# Altium PCB PCB.pcbdoc
Units mil, origin at the board's own origin, x right, y up, seen from the top; angles counter-clockwise.
Board outline 3420 x 4505 mil, 2 copper layers (Top Layer, Bottom Layer); 22 components, 33 nets, 81 pads, 18 vias.
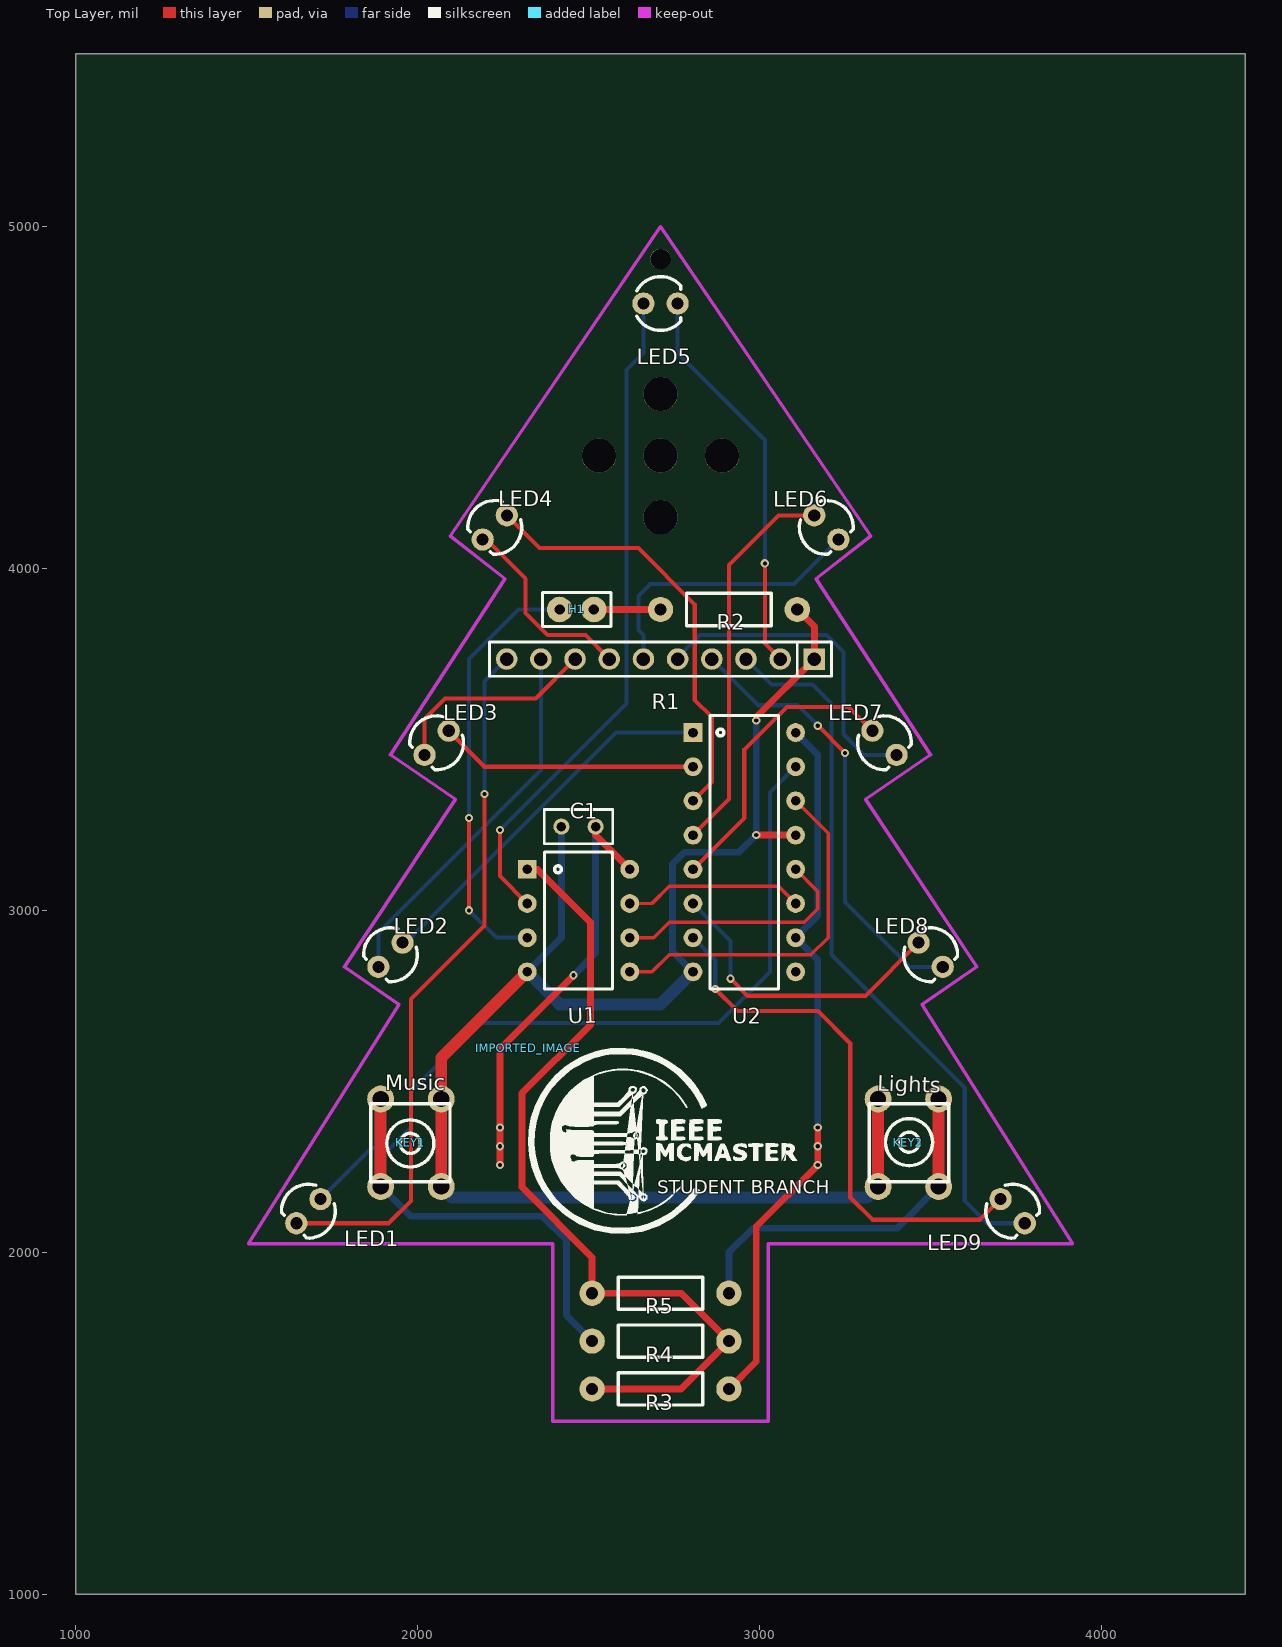
[diagram p0: Top Layer view]
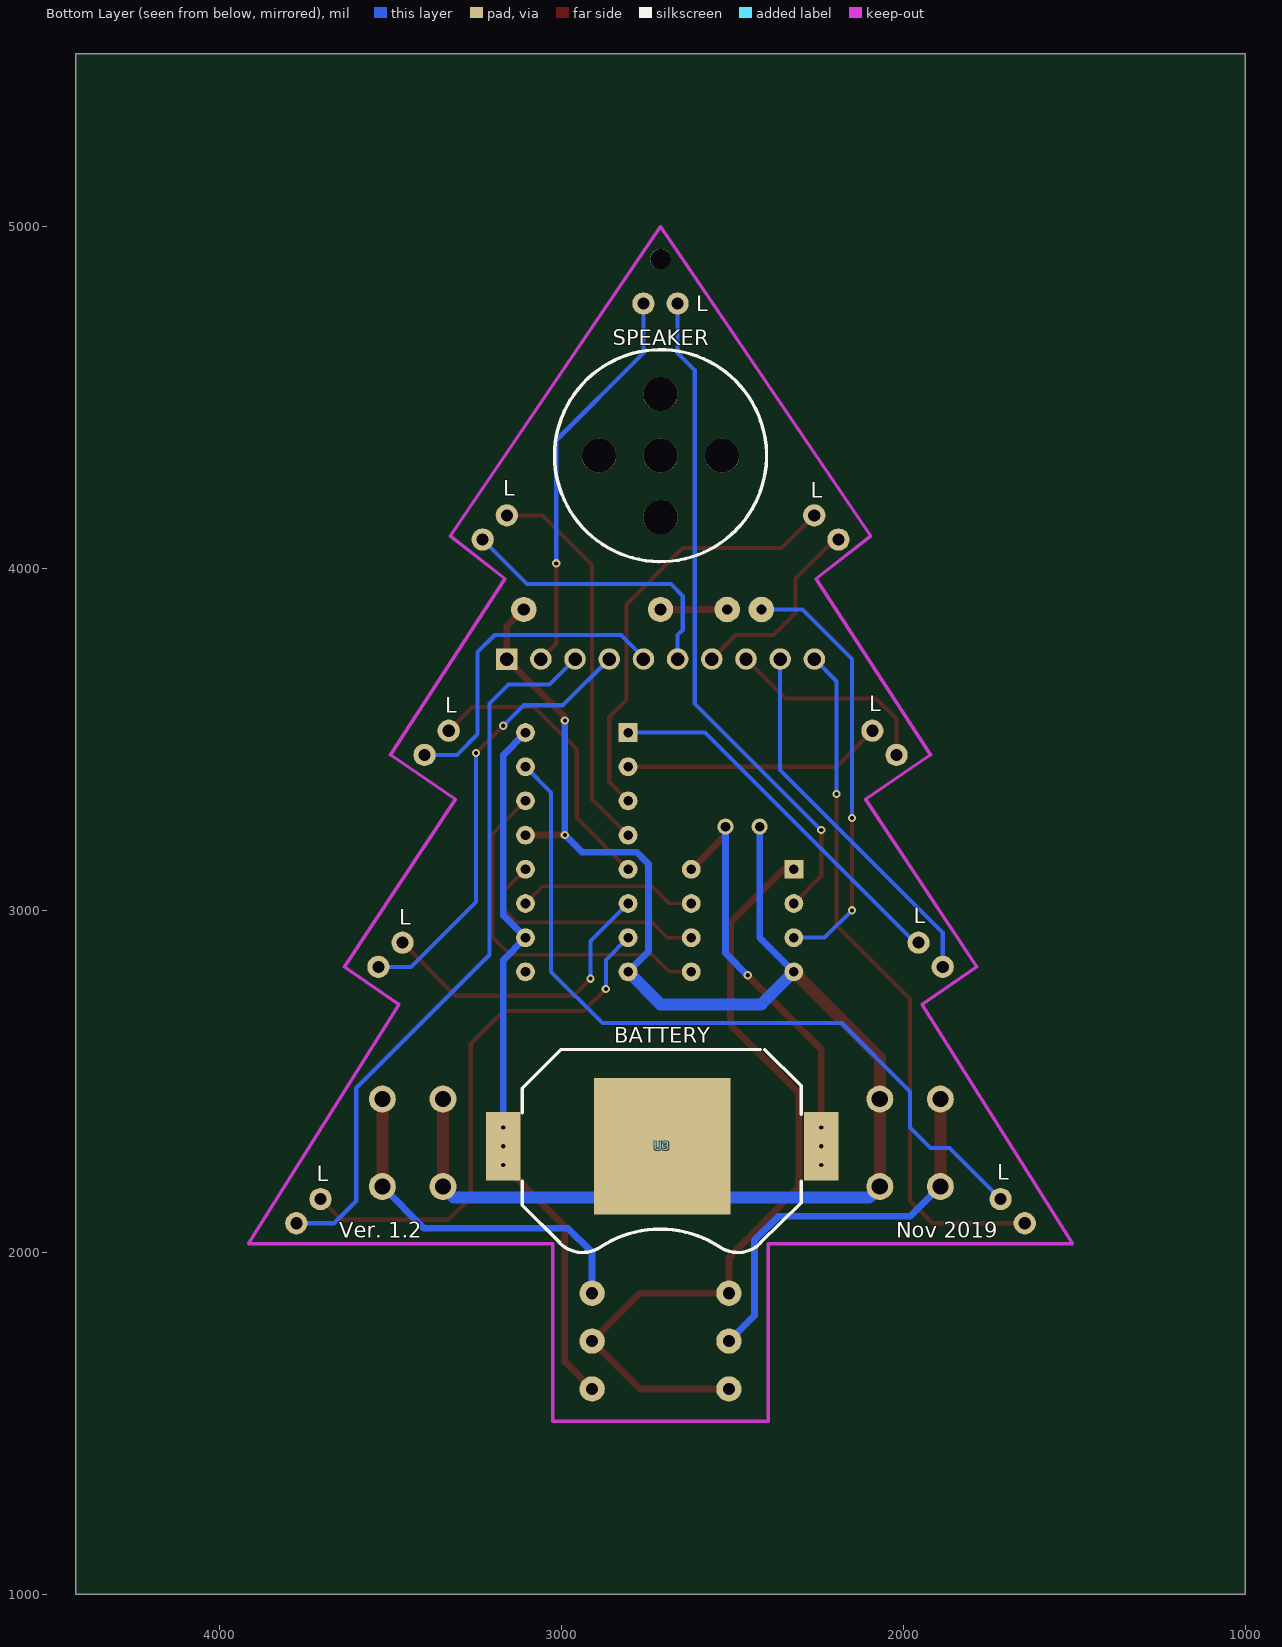
[diagram p1: Bottom Layer view, seen from below]

## Layer stack, top to bottom
Top Layer: signal copper (thickness not stored)
Dielectric: dielectric 12.6, FR-4, Dk 4.8
Bottom Layer: signal copper (thickness not stored)

## Board outline
4420,1000 1000,1000 1000,5505 4420,5505

## Components (designator, comment, footprint, x,y, rotation, side; value= is the part's Value field where it differs from the comment)
C1 "1u" RAD-0.1 2470,3245 r0 top
H1 "Speaker" HDR-2X1/2.54 2465,3880 r270 top
IMPORTED_IMAGE "IMPORTED_IMAGE" IMPORTED_IMAGE 2322.82,2596.86 r0 top
KEY1 "Music" KEY-6.0*6.0-2 1980,2320 r90 top
KEY2 "Lights" KEY-6.0*6.0-2 3435,2320 r270 top
LED1 "204-10SURD/S530-A3" LED-3MM/2.54 1680,2120 r315 top
LED2 "204-10SURD/S530-A3" LED-3MM/2.54 1920,2870 r315 top
LED3 "204-10SURD/S530-A3" LED-3MM/2.54 2055,3490 r315 top
LED4 "204-10SURD/S530-A3" LED-3MM/2.54 2225,4120 r315 top
LED5 "Yellow" LED-3MM/2.54 2710,4775 r90 top
LED6 "204-10SURD/S530-A3" LED-3MM/2.54 3195,4120 r45 top
LED7 "204-10SURD/S530-A3" LED-3MM/2.54 3365,3490 r45 top
LED8 "204-10SURD/S530-A3" LED-3MM/2.54 3500,2870 r45 top
LED9 "204-10SURD/S530-A3" LED-3MM/2.54 3740,2120 r45 top
R1 "2k Bussed Network" HDR-TH_10PIN-V-FEMALE-PITCH2.54 2710,3735 r180 top
R2 "500R" AXIAL-0.4 2910,3880 r0 top
R3 "10k" AXIAL-0.4 2710,1600 r0 top
R4 "33k" AXIAL-0.4 2710,1740 r0 top
R5 "68k" AXIAL-0.4 2710,1880 r180 top
U1 "ATtiny25" DIP8 2470,2970 r270 top
U2 "74HC595N" DIP16 2955,3170 r270 top
U3 "CR2032 SMD" "CR2032 SMD HOLDER" 2705,2310 r0 bottom

## Footprints (in the part's own frame and the unit in brackets; to place one, negate y for a bottom-side part, rotate by r counter-clockwise, add the part's x,y. Pads: shape width x height; smd on the part's side, far side on the other; paste and mask are expansions set on the pad)
AXIAL-0.4 [mil]
  round 74 hole 35.4: 1(-200,0) 2(200,0)
  silkscreen extent -124,-47 124,47
"CR2032 SMD HOLDER" [mil]
  rect 100x200 smd: +1(465,0) +2(-465,0)
  rect 400x400 smd: -(0,0)
  silkscreen extent -406,-283 409,311
DIP8 [mil]
  rect 55x55 hole 28: 1(-150,-150)
  round 55 hole 28: 2(-50,-150) 3(50,-150) 4(150,-150) 5(150,150) 6(50,150) 7(-50,150) 8(-150,150)
  silkscreen extent -200,-100 200,100
DIP16 [mil]
  rect 55x55 hole 28: 1(-350,-150)
  round 55 hole 28: 2(-250,-150) 3(-150,-150) 4(-50,-150) 5(50,-150) 6(150,-150) 7(250,-150) 8(350,-150) 9(350,150) 10(250,150) 11(150,150) 12(50,150) 13(-50,150) 14(-150,150) 15(-250,150) 16(-350,150)
  silkscreen extent -400,-100 400,100
HDR-2X1/2.54 [mm]
  round 1.9 hole 0.762: 1(0,1.27) 2(0,-1.27)
  silkscreen extent -1.27,-2.54 1.27,2.54
HDR-TH_10PIN-V-FEMALE-PITCH2.54 [mm]
  rect 1.6x1.6 hole 1: 1(-11.43,0)
  round 1.6 hole 1: 2(-8.89,0) 3(-6.35,0) 4(-3.81,0) 5(-1.27,0) 6(1.27,0) 7(3.81,0) 8(6.35,0) 9(8.89,0) 10(11.43,0)
  silkscreen extent -12.7,-1.27 12.7,1.27
IMPORTED_IMAGE [mil]
  silkscreen extent 0,-543 788,0
KEY-6.0*6.0-2 [mm]
  round 2 hole 1.2: 1(3.25,-2.25) 2(-3.25,-2.25) 3(3.25,2.25) 4(-3.25,2.25)
  silkscreen extent -2.9,-2.9 2.9,3
LED-3MM/2.54 [mil]
  round 65 hole 35.43: 1(0.01,50) 2(0.01,-50)
  silkscreen extent -79,-59 79,69
RAD-0.1 [mil]
  round 47 hole 28: 1(-50,0) 2(50,0)
  silkscreen extent -100,-50 100,50

## Free pads (board coordinates)
  round 100 hole 100 unplated: ""(2530,4330) ""(2710,4150) ""(2710,4330) ""(2710,4510) ""(2890,4330)
  round 60 hole 60 unplated: ""(2710,4905)

## Via types
v1: diameter 24, hole 12, Top Layer to Bottom Layer, 18 vias

## Nets (pads, with @x,y where several pads share a name; then routed paths per layer and width w, separated by ;. In a path a pad name is that pad's centre, name@x,y a point inside that pad or via, vN(x,y) a via of type N, cw(c..) or ccw(c..) an arc to the next point about the centre after c; other vN are vias at no path point)
GND: C1.1 KEY1.1 KEY1.2 KEY2.1 KEY2.2 R1.1 R2.2 U1.4 U2.8 U2.13 U3.- | length 4808.9
  Top Layer w20: v1(2990,3220) U2.13 ; v1(2990,3555) 2990,3565 R1.1 3160,3830 R2.2
  Top Layer w35: KEY1.2 KEY1.1 2068.58,2568.58 U1.4 ; KEY2.1 KEY2.2
  Bottom Layer w20: U1.4 2420,2920 C1.1 ; U2.8 2745,2880 2745,3135 2780,3170 2940,3170 v1(2990,3220) v1(2990,3555)
  Bottom Layer w35: KEY1.2@2068.6,2192.1 2100,2160 3314.4,2160 KEY2.1@3346.4,2192.1 ; U1.4 2415,2725 2710,2725 U2.8
H1_1: H1.1 R2.1 | length 195
  Top Layer w20: H1.1 R2.1
R1_2: LED5.2 R1.2 | length 1164.3
  Top Layer w12: v1(3015,4015) 3015,3780 R1.2
  Bottom Layer w12: LED5.2 2760,4630 3015,4375 v1(3015,4015)
R1_3: LED9.2 R1.3 | length 2122.9
  Bottom Layer w12: R1.3 3035,3660 3155,3660 3210,3605 3210,2870 3600,2480 3600,2150 3665.4,2084.6 LED9.2
R1_4: LED8.2 R1.4 | length 1303.1
  Top Layer w12: v1(3170,3540) v1(3250,3460)
  Bottom Layer w12: R1.4 2995,3600 3110,3600 v1(3170,3540) ; v1(3250,3460) 3250,3025 3440.36,2834.64 LED8.2
R1_5: LED7.2 R1.5 | length 958.1
  Bottom Layer w12: R1.5 2760,3740 2825,3805 3195,3805 3245,3755 3245,3515 3305.4,3454.6 LED7.2
R1_6: LED6.2 R1.6 | length 844.8
  Bottom Layer w12: R1.6 2660,3805 2645,3820 2645,3920 2680,3955 3100.7,3955 LED6.2
R1_7: LED4.2 R1.7 | length 573.8
  Top Layer w12: LED4.2 2200.36,4084.64 2315,3970 2315,3870 2380,3805 2490,3805 R1.7
R1_8: LED3.2 R1.8 | length 618
  Top Layer w12: LED3.2 2019.65,3559.65 2080,3620 2345,3620 R1.8
R1_9: LED2.2 R1.9 | length 1097.3
  Bottom Layer w12: LED2.2 1884.6,2934.6 2360,3410 R1.9
R1_10: LED1.2 R1.10 | length 2063.4
  Top Layer w12: LED1.2 1914.64,2084.64 1980,2150 1980,2740 2195,2955 v1(2195,3340)
  Bottom Layer w12: v1(2195,3340) 2195,3670 R1.10
R4_1: KEY1.3 KEY1.4 R4.1 | length 1190.6
  Top Layer w35: KEY1.4 KEY1.3
  Bottom Layer w20: KEY1.4@1891.4,2192.1 1892.9,2192.1 1980,2105 2365,2105 2435,2035 2435,1815 R4.1
R5_1: KEY2.3 KEY2.4 R5.1 | length 1069
  Top Layer w35: KEY2.3 KEY2.4
  Bottom Layer w20: R5.1 2910,2000 2980,2070 3401.53,2070 KEY2.3
S$398: 
S$402: 
S$409: 
S$411: 
U1_1: R3.1 R4.2 R5.2 U1.1 | length 2417.9
  Top Layer w20: U1.1 2350,3120 2505,2965 2505,2665 2305,2465 2305,2190 2510,1985 R5.2 2770,1880 R4.2 2770,1600 R3.1
U1_2: LED5.1 U1.2 | length 1962.1
  Top Layer w12: v1(2240,3235) 2240,3100 U1.2
  Bottom Layer w12: v1(2240,3235) 2610,3605 2610,4580 2660,4630 LED5.1
U1_3: H1.2 U1.3 | length 1263.2
  Top Layer w12: v1(2150,3000) v1(2150,3270)
  Bottom Layer w12: v1(2150,3000) 2230,2920 U1.3 ; v1(2150,3270) 2150,3735 2295,3880 H1.2
U2_1: LED2.1 U2.1 | length 1104.2
  Bottom Layer w12: LED2.1@1955.4,2905.3 1965.4,2905.3 2580,3520 U2.1
U2_2: LED3.1 U2.2 | length 758.4
  Top Layer w12: LED3.1@2090.4,3525.3 2195,3420 U2.2
U2_3: LED4.1 U2.3 | length 1275.9
  Top Layer w12: LED4.1@2260.4,4155.3 2355.7,4060 2645,4060 2810,3895 2810,3615 2860,3565 2860,3375 U2.3
U2_4: LED6.1 U2.4 | length 1143.3
  Top Layer w12: U2.4 2910,3325 2910,4010 3055.4,4155.4 LED6.1
U2_5: LED7.1 U2.5 | length 867.4
  Top Layer w12: U2.5 2955,3270 2955,3470 3080,3595 3260,3595 LED7.1@3329.6,3525.3
U2_6: LED8.1 U2.6 | length 900.4
  Top Layer w12: v1(2915,2800) 2965,2750 3310,2750 LED8.1@3464.6,2905.3
  Bottom Layer w12: U2.6 2915,2910 v1(2915,2800)
U2_7: LED9.1 U2.7 | length 1579.9
  Top Layer w12: v1(2870,2770) 2935,2705 3170,2705 3265,2610 3265,2160 3330,2095 3645,2095 LED9.1@3704.6,2155.3
  Bottom Layer w12: U2.7 2870,2855 v1(2870,2770)
U2_9: U2.9
U2_11: U1.7 U2.11 | length 526.4
  Top Layer w10: U1.7 2685,3020 2735,3070 3055,3070 U2.11
U2_12: U1.6 U2.12 | length 727.1
  Top Layer w10: U1.6 2690,2920 2735,2965 3130,2965 3170,3005 3170,3055 U2.12
U2_14: U1.5 U2.14 | length 1060.8
  Top Layer w10: U1.5 2685,2820 2735,2870 3150,2870 3200,2920 3200,3088.1 3200,3225 U2.14
U2_15: LED1.1 U2.15 | length 2282.5
  Bottom Layer w12: LED1.1@1715.4,2155.3 1865,2305 1920,2305 1980,2365 1980,2470 2180,2670 2880,2670 3030,2820 3030,3345 U2.15
VCC: C1.2 R3.2 U1.8 U2.10 U2.16 U3.+1 U3.+2 | length 3435.9
  Top Layer w20: v1(2240,2255) v1(2240,2365) 2240,2595 v1(2455,2810) ; C1.2 2520,3220 U1.8 ; R3.2 2990,1680 2990,2075 v1(3170,2255) v1(3170,2365)
  Bottom Layer w20: v1(2455,2810) 2520,2875 C1.2 ; U2.16 3170,3455 3170,2985 U2.10 3170,2855 v1(3170,2310)
  other v1: 2240,2310

## Silkscreen, mask and mechanical layers (free items; w line width, h text height)
Top Overlay:
  text "STUDENT BRANCH" at 2700,2171.2 h40
Bottom Overlay:
  circle w10: c2710,4330 r310
  text "L" at 2605,4752.5 h45
  text "SPEAKER" at 2850,4652.5 h45
  text "L" at 3170,4212.5 h45
  text "L" at 2270,4207.5 h45
  text "L" at 2100,3582.5 h45
  text "L" at 3340,3577.5 h45
  text "L" at 1970,2962.5 h45
  text "L" at 3475,2957.5 h45
  text "BATTERY" at 2845,2612.5 h45
  text "L" at 1725,2212.5 h45
  text "L" at 3715,2207.5 h45
  text "Nov 2019" at 2020,2042.5 h45
  text "Ver. 1.2" at 3650,2042.5 h45